# Altium PCB PCB1.PcbDoc
Units mil, origin at the board's own origin, x right, y up, seen from the top; angles counter-clockwise.
Board outline 6000 x 4000 mil, 2 copper layers (Top Layer, Bottom Layer); 12 components, 28 nets, 48 pads, 0 vias.
Unrouted connection lines stored in the file: 30.
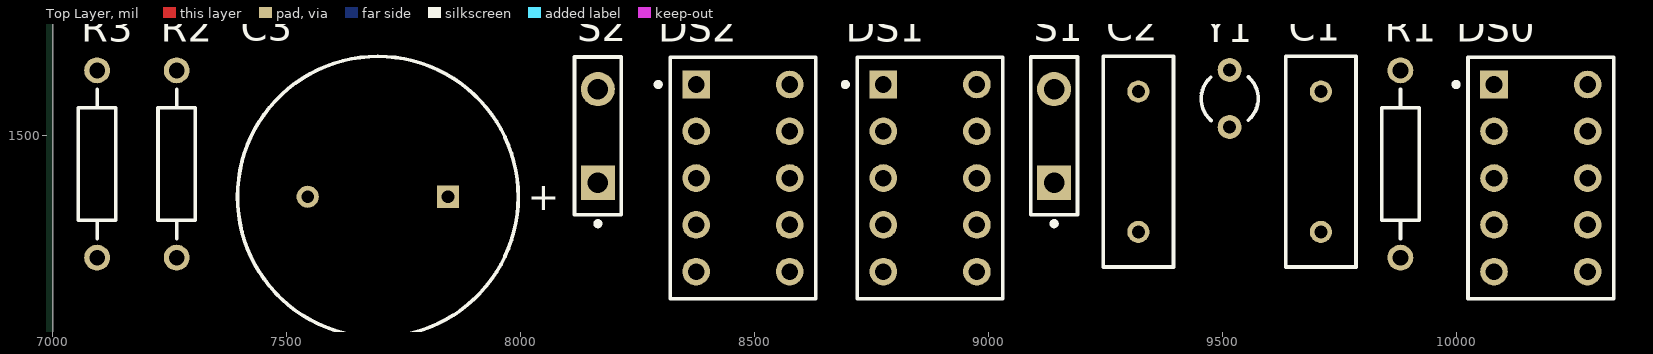
[diagram p0: Top Layer view]
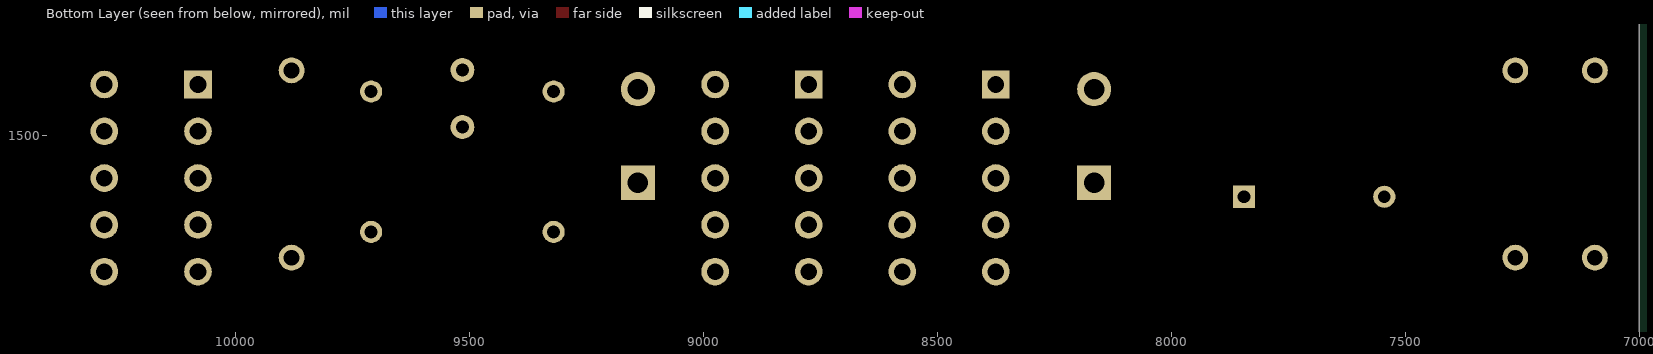
[diagram p1: Bottom Layer view, seen from below]

## Layer stack, top to bottom
Top Layer: signal copper 1.4
Dielectric: dielectric 12.6, FR-4, Dk 4.8
Bottom Layer: signal copper 1.4

## Board outline
1000,1000 7000,1000 7000,5000 1000,5000

## Design rules (kind name [scope] priority, off if disabled: settings)
Clearance [All] p1: gap=10
PolygonConnect [All] p1: connectstyle=Relief reliefconductorwidth=10 reliefentries=4 polygonreliefangle="90 Angle"
RoomDefinition key_count [InComponentClass('key_count')] p1: confinementstyle=ConfineIn formatcopy=TRUE lockcomponents=FALSE outline 7045,1060 10345,1060 10345,1780 7045,1780
RoutingVias [All] p1: holewidth=28 width=50 viastyle="Through Hole" minholewidth=28 minwidth=50 maxholewidth=28 maxwidth=50
SilkscreenOverComponentPads [All] p1: minsilkscreentomaskgap=10
SolderMaskExpansion [All] p1: expansion=4
Width [All] p1: maxlimit=10 minlimit=10 preferedwidth=10
27 further rules are at their usual default settings.

## Components (designator, comment, footprint, x,y, rotation, side; value= is the part's Value field where it differs from the comment)
C1 "Cap" RAD-0.3 9710,1445 r90 top
C2 "Cap" RAD-0.3 9320,1445 r90 top
C3 "Cap Pol1" RB7.6-15 7695,1370 r0 top
DS0 "Dpy Amber-CC" A 10180,1410 r0 top
DS1 "Dpy Amber-CC" A 8875,1410 r0 top
DS2 "Dpy Amber-CC" A 8475,1410 r0 top
R1 "Res2" AXIAL-0.4 9880,1440 r90 top
R2 "Res2" AXIAL-0.4 7265,1440 r90 top
R3 "Res2" AXIAL-0.4 7095,1440 r90 top
S1 "SW-PB" SPST-2 9140,1500 r90 top
S2 "SW-PB" SPST-2 8165,1500 r90 top
Y1 "XTAL" R38 9515,1580 r0 top

## Footprints (in the part's own frame and the unit in brackets; to place one, negate y for a bottom-side part, rotate by r counter-clockwise, add the part's x,y. Pads: shape width x height; smd on the part's side, far side on the other; paste and mask are expansions set on the pad)
A [mm] "LED, 7-Segment Display, 7.62 mm, RHD; 10 Leads; Row Space 5.08 mm; Pitch 2.54 mm"
  rect 1.5x1.5 hole 0.9: 1(-2.54,5.08)
  round 1.5 hole 0.9: 2(-2.54,2.54) 3(-2.54,0) 4(-2.54,-2.54) 5(-2.54,-5.08) 6(2.54,-5.08) 7(2.54,-2.54) 8(2.54,0) 9(2.54,2.54) 10(2.54,5.08)
  silkscreen extent -4.72,-6.55 3.95,6.55, body extent -3.95,-6.55 3.95,6.55, height 6.34
AXIAL-0.4 [mm] "Axial Device, Thru-Hole; 2 Leads; 0.4 in Pin Spacing"
  round 1.4 hole 0.85: 1(-5.08,0) 2(5.08,0)
  silkscreen extent -4.06,-1.02 4.06,1.02
R38 [mm] "Crystal, Thru-Hole; 2 Leads; Body 3.1 x 8.2 mm (Dia.xH)"
  round 1.3 hole 0.7: 1(0,1.55) 2(0,-1.55)
  silkscreen extent -1.55,-1.19 1.55,1.17
RAD-0.3 [mm] "Radial Cap, Thru-Hole; 2 Leads; 0.3 in Pin Spacing"
  round 1.2 hole 0.7: 1(-3.81,0) 2(3.81,0)
  silkscreen extent -5.71,-1.91 5.71,1.91
RB7.6-15 [mm] "Polarized Capacitor (Radial); 2 Leads"
  rect 1.2x1.2 hole 0.7: 1(3.81,0)
  round 1.2 hole 0.7: 2(-3.81,0)
  silkscreen extent -7.62,-7.62 7.62,7.62
SPST-2 [mm] "Switch; 2 Leads"
  rect 1.85x1.85 hole 1.1: 1(-2.54,0)
  round 1.85 hole 1.1: 2(2.54,0)
  silkscreen extent -4.89,-1.27 4.28,1.27

## Part data
C1 C2: "Capacitor"
C3: "Polarized Capacitor (Radial)"
DS0 DS1 DS2: "7.62 mm Black Surface Orange 7-Segment Display: CC, RH DP"
R1 R2 R3: "Resistor"
S1 S2: "Switch"
Y1: "Crystal Oscillator"

## Nets (pads, with @x,y where several pads share a name; then routed paths per layer and width w, separated by ;. In a path a pad name is that pad's centre, name@x,y a point inside that pad or via, vN(x,y) a via of type N, cw(c..) or ccw(c..) an arc to the next point about the centre after c; other vN are vias at no path point)
D0: DS0.10 DS1.10 DS2.10
D1: DS0.9 DS1.9 DS2.9
D2: DS0.8 DS1.8 DS2.8
D3: DS0.5 DS1.5 DS2.5
D4: DS0.4 DS1.4 DS2.4
D5: DS0.2 DS1.2 DS2.2
D6: DS0.3 DS1.3 DS2.3
D7: DS0.7 DS1.7 DS2.7
GND: C1.1 C2.1 R3.1 S1.1
INT0: R1.1 S1.2
NetR2_1: R2.1 S2.1
P0: 
P1: 
P2: 
P2.2: 
P2.3: 
P3: 
P4: 
P5: 
P6: 
P7: 
RST: C3.2 R2.2 R3.2
VCC: C3.1 DS0.1 DS1.1 DS2.1 R1.2 S2.2
W0: DS0.6
W1: DS1.6
W2: DS2.6
XTAL1: C2.2 Y1.1
XTAL2: C1.2 Y1.2

## Text inside footprints (layer, text, board x,y; h text height)
C3: Top Overlay "+" at 8015.15,1340.99 h59.06